# EAGLE board rauschsimulator_V4 (EAGLE 6.4)
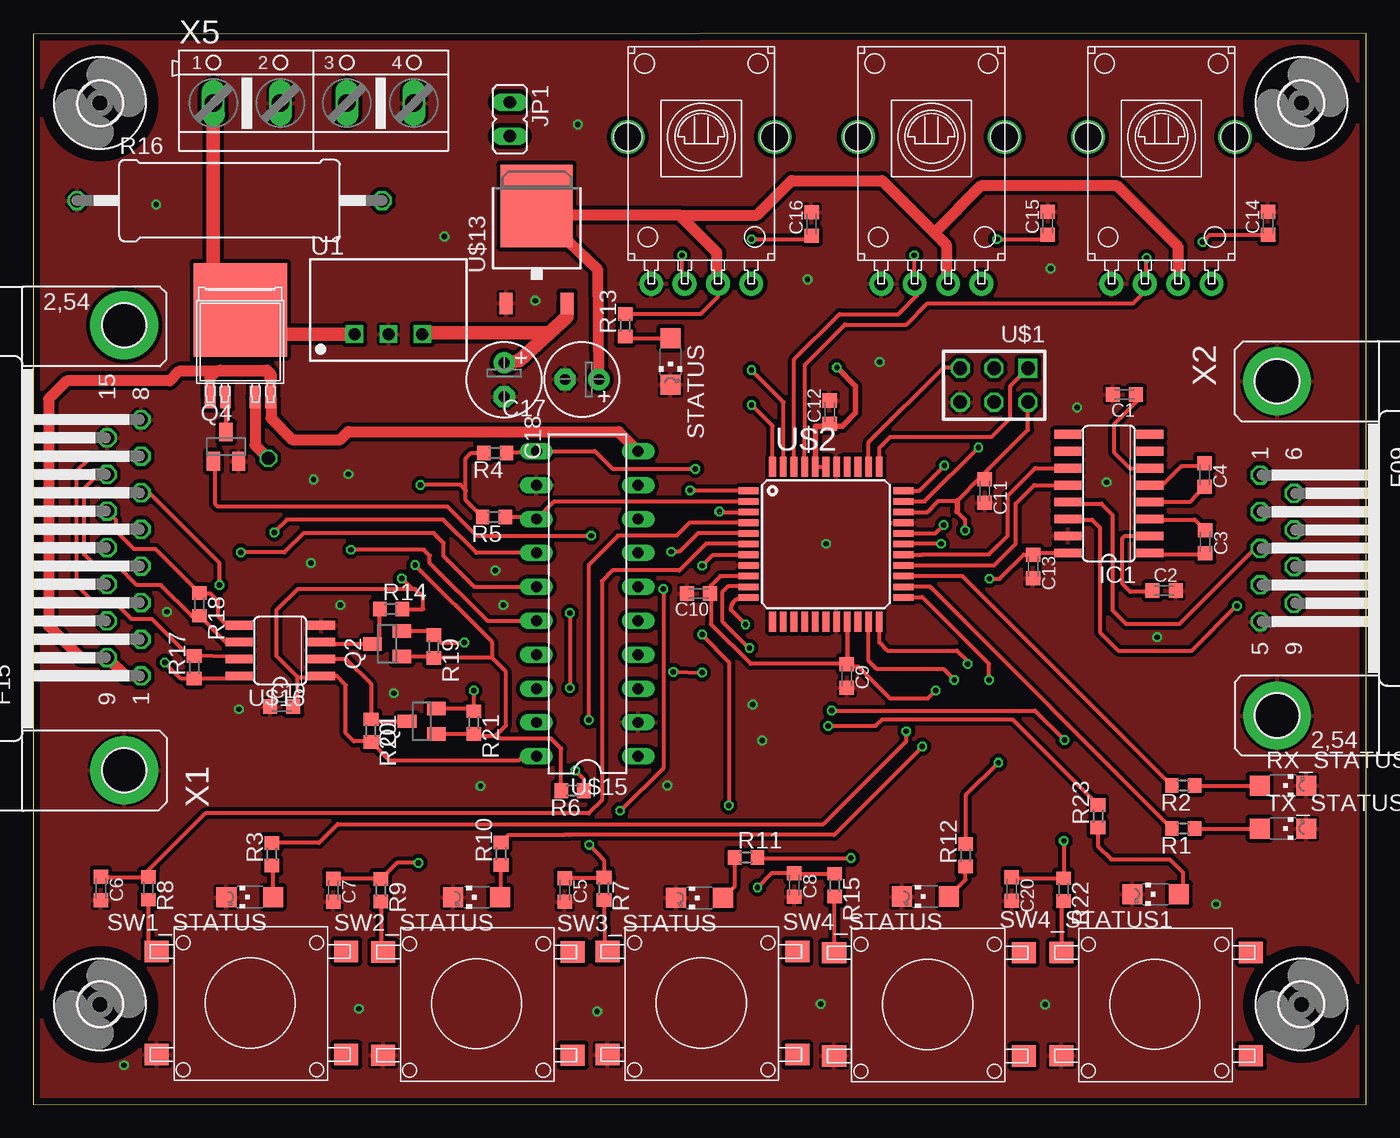
[diagram p0: board, top side]
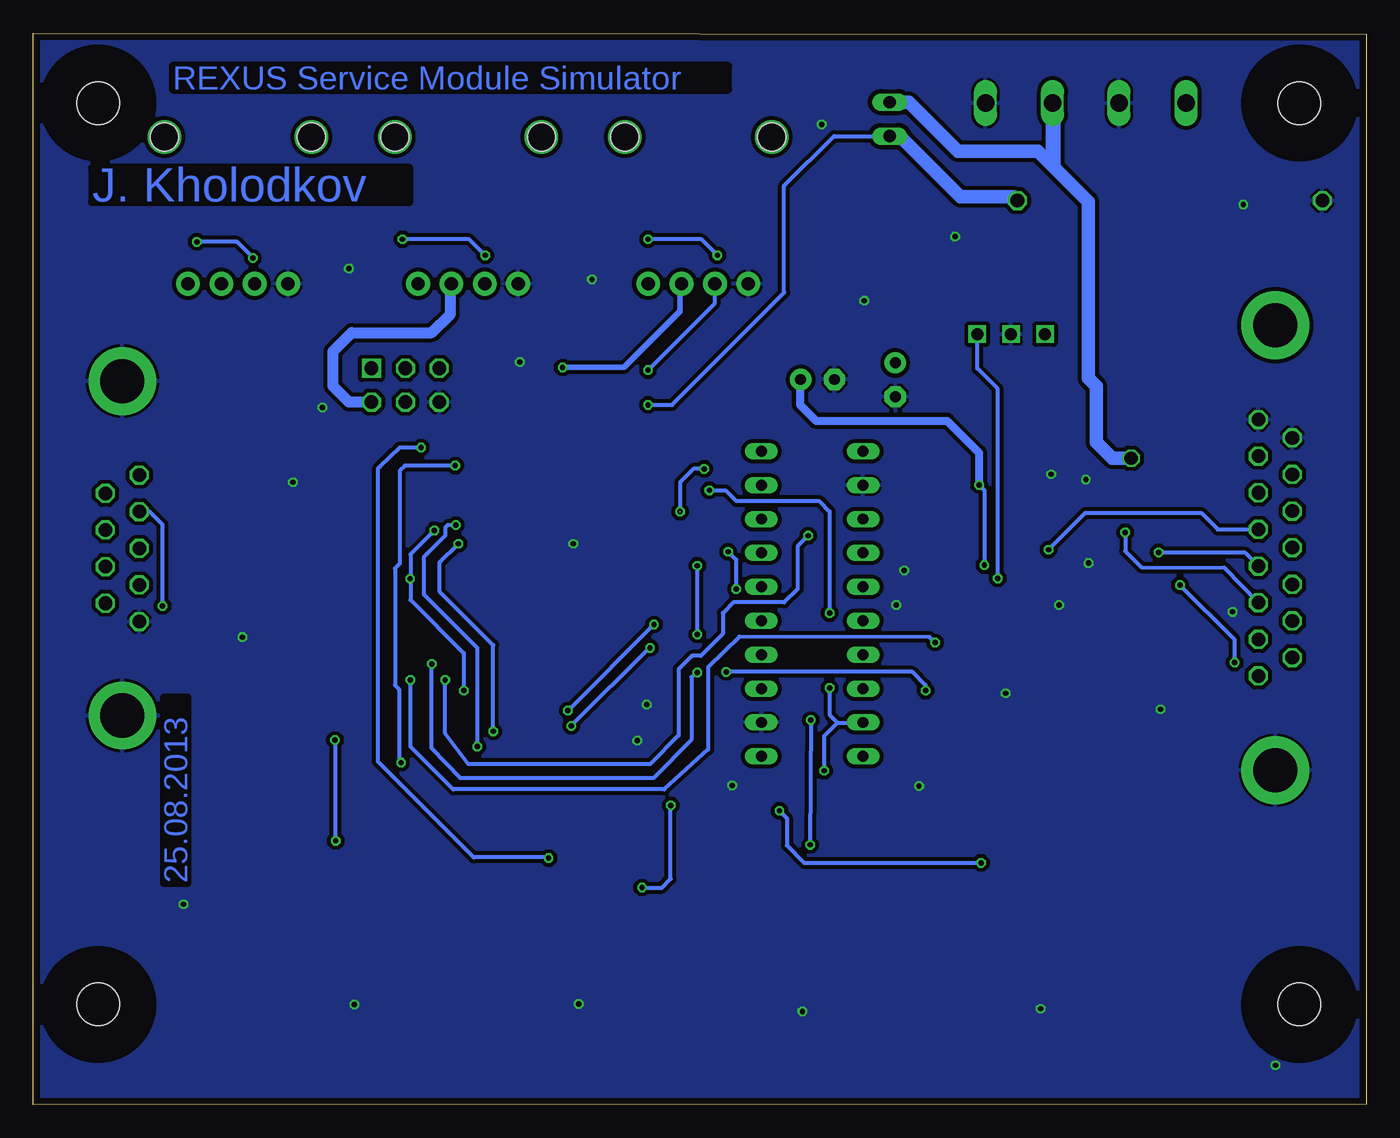
[diagram p1: board, bottom side, seen from below]

Size 99.85 x 80.22 mm. Coordinates in mm from the lower left corner, seen from the top.
Outline: 0,0 99.85,0 99.85,80.22 0,80.14 0,0
Copper layers (1*16): Top 0.035mm / dielectric 1.5mm / Bottom 0.035mm
Design rules "default": minimum track width 6mil, minimum drill 12mil, track to track 6mil, track to pad 6mil, pad to pad 6mil, via to via 6mil, smd to smd 6mil, copper to edge 20mil, drill to drill 8mil, minimum pad ring 8mil, minimum via ring 6mil, stop-mask expansion 3mil, vias tented up to drill 0mil, thermal gap 8mil

## Footprints (pad centres in the part's own frame; a part is rotated, then mirrored left to right if it is on the bottom)
C0603K = smd 1.05 x 1.08: 1 -0.875,0; 2 0.875,0
E2,5-6 = drill 0.813 pad 1.6: + -1.27,0 | drill 0.813 pad 1.6 octagon: - 1.27,0
SO16 = smd 0.66 x 2.032: 1 -4.445,-3.073; 2 -3.175,-3.073; 3 -1.905,-3.073; 4 -0.635,-3.073; 5 0.635,-3.073; 6 1.905,-3.073; 7 3.175,-3.073; 8 4.445,-3.073; 9 4.445,3.073; 10 3.175,3.073; 11 1.905,3.073; 12 0.635,3.073; 13 -0.635,3.073; 14 -1.905,3.073; 15 -3.175,3.073; 16 -4.445,3.073
JP1 = drill 0.914 long: 1 0,-1.27; 2 0,1.27
SOT23 = smd 1 x 1.4: 1 -0.95,-1.1; 2 0.95,-1.1; 3 0,1.1
R0603 = smd 1 x 1.1: 1 -0.85,0; 2 0.85,0
0617/22 = drill 1.016 octagon: 1 -11.43,0; 2 11.43,0
CHIPLED_1206 = smd 1.5 x 1.5: A 0,-1.75; C 0,1.75
IP67 = smd 1.6 x 1.8: 1 -3.865,7; 2 -3.865,-7.2; 3 3.865,7; 4 3.865,-7.2
TSR-1 = drill 0.9 square: 1 -2.54,0; 2 0,0; 3 2.54,0
AVR-ISP-6 = drill 1.016 square: 1 -2.54,-1.27 | drill 1.016 octagon: 2 -2.54,1.27; 3 0,-1.27; 4 0,1.27; 5 2.54,-1.27; 6 2.54,1.27
TQFP44 = smd 1.5 x 0.5: 1 -5.8,4; 2 -5.8,3.2; 3 -5.8,2.4; 4 -5.8,1.6; 5 -5.8,0.8; 6 -5.8,0; 7 -5.8,-0.8; 8 -5.8,-1.6; 9 -5.8,-2.4; 10 -5.8,-3.2; 11 -5.8,-4; 23 5.8,-4; 24 5.8,-3.2; 25 5.8,-2.4; 26 5.8,-1.6; 27 5.8,-0.8; 28 5.8,0; 29 5.8,0.8; 30 5.8,1.6; 31 5.8,2.4; 32 5.8,3.2; 33 5.8,4 | smd 0.5 x 1.5: 12 -4,-5.8; 13 -3.2,-5.8; 14 -2.4,-5.8; 15 -1.6,-5.8; 16 -0.8,-5.8; 17 0,-5.8; 18 0.8,-5.8; 19 1.6,-5.8; 20 2.4,-5.8; 21 3.2,-5.8; 22 4,-5.8; 34 4,5.8; 35 3.2,5.8; 36 2.4,5.8; 37 1.6,5.8; 38 0.8,5.8; 39 0,5.8; 40 -0.8,5.8; 41 -1.6,5.8; 42 -2.4,5.8; 43 -3.2,5.8; 44 -4,5.8
VERT_POTI = drill 1 pad 1.778: P1 -3.75,-11; P2 -1.25,-11; P3 1.25,-11; P4 3.75,-11 | drill 2.1: P$5 5.5,0; P$6 -5.5,0 | hole 2.1: 5.5,0; -5.5,0
3,2 = hole 3.2: 0,0
TO252 = smd 1 x 1.6: 1 -2.28,-4.8; 2 2.28,-4.8 | smd 5.4 x 6.2: 3 0,2.5
TO-252-5-1 = smd 0.813 x 1.676: PIN1 -2.255,-3; PIN2 -1.115,-3; PIN4 1.115,-3; PIN5 2.255,-3 | smd 7 x 7: TAB 0,3.51
DIL20 = drill 0.813 long: 1 -3.81,11.43; 2 -3.81,8.89; 3 -3.81,6.35; 4 -3.81,3.81; 5 -3.81,1.27; 6 -3.81,-1.27; 7 -3.81,-3.81; 8 -3.81,-6.35; 9 -3.81,-8.89; 10 -3.81,-11.43; 11 3.81,-11.43; 12 3.81,-8.89; 13 3.81,-6.35; 14 3.81,-3.81; 15 3.81,-1.27; 16 3.81,1.27; 17 3.81,3.81; 18 3.81,6.35; 19 3.81,8.89; 20 3.81,11.43
SO08 = smd 0.66 x 2.032: 1 -1.905,-3.073; 2 -0.635,-3.073; 3 0.635,-3.073; 4 1.905,-3.073; 5 1.905,3.073; 6 0.635,3.073; 7 -0.635,3.073; 8 -1.905,3.073
F15HP = drill 1.016 octagon: 1 -9.601,-1.27; 2 -6.858,-1.27; 3 -4.115,-1.27; 4 -1.372,-1.27; 5 1.372,-1.27; 6 4.115,-1.27; 7 6.858,-1.27; 8 9.601,-1.27; 9 -8.23,1.27; 10 -5.486,1.27; 11 -2.743,1.27; 12 0,1.27; 13 2.743,1.27; 14 5.486,1.27; 15 8.23,1.27 | drill 3.302 pad 5.08: G1 -16.662,0; G2 16.662,0
F09HP = drill 1.016 octagon: 1 -5.486,-1.27; 2 -2.743,-1.27; 3 0,-1.27; 4 2.743,-1.27; 5 5.486,-1.27; 6 -4.115,1.27; 7 -1.372,1.27; 8 1.372,1.27; 9 4.115,1.27 | drill 3.302 pad 5.08: G1 -12.522,0; G2 12.522,0
AK500/4 = drill 1.321 long: 1 -7.518,0; 2 -2.489,0; 3 2.489,0; 4 7.518,0

## Placement (x,y rotation side)
C1  200n  [C0603K]  81.73,53.17 180 top
C2  200n  [C0603K]  84.72,38.49 0 top
C3  200n  [C0603K]  87.8,42.15 270 top
C4  200n  [C0603K]  87.74,47.16 270 top
C5  100n  [C0603K]  39.8,16.06 270 top
C6  100n  [C0603K]  5.06,16.18 270 top
C7  100n  [C0603K]  22.47,16.05 270 top
C8  100n  [C0603K]  57.01,16.43 270 top
C9  100n  [C0603K]  60.94,32.1 270 top
C10  100n  [C0603K]  49.83,38.27 180 top
C11  100n  [C0603K]  71.27,45.94 270 top
C12  100n  [C0603K]  59.65,51.85 90 top
C13  200n  [C0603K]  74.9,40.3 270 top
C14  100n  [C0603K]  92.5,66 90 top
C15  100n  [C0603K]  76,66 90 top
C16  100n  [C0603K]  58.3,65.95 90 top
C17  [E2,5-6]  41.1,54.3 180 top
C18  [E2,5-6]  35.27,54.28 270 top
C19  100n  [C0603K]  18.6,29.8 0 top
C20  100n  [C0603K]  73.29,16.15 270 top
IC1  MAX3232ESE  [SO16]  80.58,45.76 90 top
JP1  [JP1]  35.7,73.8 180 top
Q1  BSS123  [SOT23]  29.1,28.7 90 top
Q2  BSS123  [SOT23]  26.5,34.5 90 top
Q4  BSS123  [SOT23]  14.44,49.27 0 top
R1  220  [R0603]  86.14,20.67 180 top
R2  220  [R0603]  86.14,23.89 180 top
R3  220  [R0603]  17.88,18.75 90 top
R4  10k  [R0603]  34.6,48.8 180 top
R5  10k  [R0603]  34.5,44 180 top
R6  10k  [R0603]  40.4,23.5 180 top
R7  1k  [R0603]  42.75,16.16 270 top
R8  1k  [R0603]  8.62,16.18 270 top
R9  1k  [R0603]  26.04,16.05 270 top
R10  220  [R0603]  35.04,18.77 90 top
R11  220  [R0603]  53.4,18.51 0 top
R12  220  [R0603]  69.85,18.67 90 top
R13  220  [R0603]  44.34,58.36 90 top
R14  10k  [R0603]  26.8,37.1 0 top
R15  1k  [R0603]  60.03,16.43 270 top
R16  [0617/22]  14.7,67.7 0 top
R17  10k  [R0603]  12.05,32.75 90 top
R18  100k  [R0603]  12.45,37.45 270 top
R19  10k  [R0603]  30,34.3 270 top
R20  10k  [R0603]  25.3,28 270 top
R21  10k  [R0603]  33,28.6 270 top
R22  1k  [R0603]  77.18,16.1 270 top
R23  220  [R0603]  79.76,21.59 90 top
RX_STATUS  [CHIPLED_1206]  93.62,23.89 270 top
STATUS  [CHIPLED_1206]  47.73,55.65 180 top
SW1  SMS_IP67  [IP67]  16.23,7.6 90 top
SW1_STATUS  [CHIPLED_1206]  16.21,15.54 90 top
SW2  SMS_IP67  [IP67]  33.2,7.55 90 top
SW2_STATUS  [CHIPLED_1206]  33.21,15.52 90 top
SW3  SMS_IP67  [IP67]  50.03,7.6 90 top
SW3_STATUS  [CHIPLED_1206]  49.91,15.47 90 top
SW4  SMS_IP67  [IP67]  67,7.5 90 top
SW4_STATUS  [CHIPLED_1206]  66.83,15.58 90 top
SW4_STATUS1  [CHIPLED_1206]  84.07,15.75 90 top
SW5  SMS_IP67  [IP67]  84.02,7.52 90 top
TX_STATUS  [CHIPLED_1206]  93.62,20.67 270 top
U1  TSR_1-2450  [TSR-1]  26.6,57.7 0 top
U$1  AVR-PDIVERT  [AVR-ISP-6]  71.98,53.87 180 top
U$2  XMEGA-A4TQFP  [TQFP44]  59.38,41.97 0 top
U$3  [VERT_POTI]  50.04,72.47 0 top
U$4  [VERT_POTI]  67.28,72.47 0 top
U$5  [VERT_POTI]  84.52,72.47 0 top
U$6  [3,2]  5,75 0 top
U$7  [3,2]  95,75 0 top
U$8  [3,2]  95,7.5 0 top
U$10  [3,2]  5,7.5 0 top
U$13  LM1117  [TO252]  37.7,64.8 0 top
U$14  BTS6143  [TO-252-5-1]  15.5,56 0 top
U$15  UDN2596  [DIL20]  41.5,37.5 180 top
U$16  SP490  [SO08]  18.5,34 90 top
X1  [F15HP]  6.8,41.7 90 top
X2  [F09HP]  93.18,41.66 270 top
X5  [AK500/4]  21,75 0 top

## Library data of the parts
C1-C16 C19 C20 R1-R23 = rcl
C17 C18 = resistor
IC1 = maxim; MF: MAXIM; MPN: MAX3232ESE; OC_FARNELL: 9725539; OC_NEWARK: 79C3880
JP1 = jumper
Q1 Q2 Q4 = transistor-small-signal
RX_STATUS STATUS SW1_STATUS SW2_STATUS SW3_STATUS SW4_STATUS SW4_STATUS1 TX_STATUS = led
SW1-SW5 = SMSIp67
U1 = _traco_tsr-1
U$1 U$2 = avr-7
U$3-U$5 = poti
U$6-U$8 U$10 = holes
U$13 = LM1117
U$14 = BTS6134
U$15 = UDN2596
U$16 = SP491
X1 X2 = con-subd; OC_FARNELL: unknown; OC_NEWARK: unknown
X5 = con-ptr500; OC_FARNELL: unknown; OC_NEWARK: unknown

## Nets
28V_IN: U1.1 U$14.TAB X5.1
28V_OUT: U$14.PIN1 U$14.PIN5 U$15.10 X1.1 X1.9
COMMANDS_TO_EXP+: R18.1 U$16.5 X1.13
COMMANDS_TO_EXP-: R18.2 U$16.6 X1.14
DATA_FROM_EXP+: R17.1 U$16.8 X1.6
DATA_FROM_EXP-: R17.2 U$16.7 X1.7
GND: C1.2 C2.2 C5.2 C6.2 C7.2 C8.2 C9.2 C10.2 C11.2 C12.2 C13.2 C14.2 C15.2 C16.2 C17.- C18.- C19.1 C20.2 IC1.15 Q4.2 R16.1 RX_STATUS.C STATUS.C SW1.1 SW1_STATUS.C SW2.1 SW2_STATUS.C SW3.1 SW3_STATUS.C SW4.1 SW4_STATUS1.C SW4_STATUS.C SW5.1 TX_STATUS.C U1.2 U$1.6 U$2.8 U$2.18 U$2.30 U$2.38 U$3.P1 U$4.P1 U$5.P1 U$13.1 U$15.2 U$15.12 U$16.4 X1.8 X1.15 X1.G1 X2.5 X2.G1 X2.G2 X5.2 X5.4
ISENSE: JP1.2 R16.2 U$2.44
LO: U$15.16 X1.5
LO_: R6.1 U$2.1 U$15.19
N$1: C1.1 IC1.6
N$2: C2.1 IC1.2
N$3: C4.2 IC1.4
N$4: C4.1 IC1.5
N$5: C3.1 IC1.3
N$6: C3.2 IC1.1
N$7: U$1.1 U$2.34
N$8: Q1.2 R21.1 U$2.22
N$9: Q2.2 R19.1 U$2.23
N$10: IC1.13 X2.3
N$13: R8.2 SW1.3
N$14: IC1.14 X2.2
N$15: R9.2 SW2.3
N$16: R7.2 SW3.3
N$17: U$1.5 U$2.35
N$18: Q4.3 U$14.PIN2
N$19: U$2.12
N$20: R10.1 SW2_STATUS.A
N$21: R1.1 TX_STATUS.A
N$22: R2.1 RX_STATUS.A
N$23: R3.1 SW1_STATUS.A
N$24: R11.1 SW3_STATUS.A
N$25: R12.1 SW4_STATUS.A
N$26: R13.1 STATUS.A
N$27: R15.2 SW4.3
N$29: U$2.13
N$30: U$2.14
N$31: U$2.15
N$32: U$2.16
N$33: U$2.17
N$34: U$2.20
N$35: R23.1 SW4_STATUS1.A
N$36: JP1.1 U$14.PIN4 X5.3
N$38: R22.2 SW5.3
POTI1: C14.1 U$2.41 U$5.P2
POTI2: C15.1 U$2.42 U$4.P2
POTI3: C16.1 U$2.43 U$3.P2
RXD_EX: Q1.3 R20.1 U$16.2
RXD_GRND: IC1.12 U$2.26
RXD_STATUS: R2.2 U$2.25
SODS: U$15.14 X1.3
SODS_: R4.1 U$2.3 U$15.11
SOE: U$15.15 X1.4
SOE_: R5.1 U$2.2 U$15.13
SUPPLY_CTRL: Q4.1 U$2.21
SW1: C5.1 R7.1 U$2.4
SW1_STATUS: R3.2 U$2.28
SW2: C7.1 R9.1 U$2.5
SW2_STATUS: R10.2 U$2.29
SW3: C6.1 R8.1 U$2.6
SW3_STATUS: R11.2 U$2.32
SW4: C8.1 R15.1 U$2.7
SW4_STATUS: R12.2 U$2.33
SW5: C20.1 R22.1 U$2.11
SW5_STATUS: R23.2 U$2.10
TXD_EX: Q2.3 R14.1 U$16.3
TXD_GRND: IC1.11 U$2.27
TXD_STATUS: R1.2 U$2.24
VCC_3V: C9.1 C10.1 C11.1 C12.1 C13.1 C17.+ IC1.16 Q1.1 Q2.1 R4.2 R5.2 R6.2 R13.2 R19.2 R21.2 U$1.2 U$2.9 U$2.19 U$2.31 U$2.39 U$2.40 U$3.P3 U$4.P3 U$5.P3 U$13.3
VCC_5V: C18.+ C19.2 R14.2 R20.2 U1.3 U$13.2 U$15.20 U$16.1

## Tracks (layer width: path | path; a pad name or v marks a point on that pad's centre or on a via)
28V_IN
  Top 0.305: U$14.TAB 17.31,57.7
  Top 1.016: U$14.TAB 13.48,61.53 X5.1 | 17.31,57.7 U1.1
28V_OUT
  Top 0.406: U$14.PIN5 17.75,54.6 17.75,54.8 17.45,55.1 14.15,55.1 13.24,54.2 U$14.PIN1
  Top 0.813: U$14.PIN5 17.8,52.95 | 17.8,52.95 17.8,51.4 19.4,49.8 23,49.8 23.6,50.4 43.84,50.4 U$15.10 | U$14.PIN1 13.25,54.55 13.65,54.95 13.95,54.95 14,55 17.5,55 17.8,54.7 17.8,54.2 | 17.8,52.95 17.8,54.2 | 17.8,54.2 17.75,54.25 17.75,54.6 17.45,54.9 10.9,54.9 10.2,54.2 2.5,54.2 1.15,52.85 1.15,35.85 3.53,33.47 X1.9 6.9,32.1 X1.1
COMMANDS_TO_EXP+
  Top 0.305: U$16.5 14.49,35.91 13.85,36.55 13.85,37.7 13.3,38.25 12.5,38.25 R18.1 9.15,41.6 7.55,41.6 6.2,42.95 6.2,43.77 X1.13
COMMANDS_TO_EXP-
  Top 0.305: U$16.6 14.41,34.63 R18.2 11.85,36.6 9.55,38.9 7.75,38.9 6.35,40.3 4.7,40.3 3.8,41.2 3.8,46.15 4.55,46.9 5.24,46.9 X1.14
DATA_FROM_EXP+  (via drill 0.4)
  Top 0.305: U$16.8 15.23,31.9 R17.1 11.05,31.9 v9.85,33.1 | v13.95,38.9 13.95,40.55 8.69,45.81 X1.6
  Bottom 0.305: v9.85,33.1 9.85,34.8 v13.95,38.9
DATA_FROM_EXP-
  Top 0.305: U$16.7 14.84,33.55 R17.2 11.65,33.6 8.9,36.35 7.35,36.35 6.05,37.65 4.5,37.65 3.25,38.9 3.25,47.45 4.1,48.3 4.1,48.35 4.35,48.6 8.03,48.6 X1.7
GND  (via drill 0.4)
  other vias: 23,37.4 15.4,29.6 6.8,2.94 24.39,7.17 42.23,6.97 58.99,7.53 37.6,60.2 30.8,65 40.8,73.4 78.2,52.2 59.4,42 23.6,47.2 20.8,40.55 76.2,62.6 58,61.8 9.2,67.4 88.6,15 80.4,46.6 21,46.8 63.4,55.6 53.9,29.95 54.6,27.25 27,30.8 35.2,37.4 34.6,40 84.2,35 47.5,23.9 33.5,23.85 75.79,7.48 10,36.9
  pour Bottom (isolate 0.305): 0,80 0,0 100,0 100,80
  pour Top (isolate 0.305): 0,80 0,0.05 100,0 100,80
ISENSE  (via drill 0.4)
  Top 0.305: U$2.44 55.38,50.82 v53.8,52.4
  Bottom 0.305: v53.8,52.4 52,52.4 43.6,60.8 43.6,68.8 39.87,72.53 JP1.2
  Bottom 1.016: R16.2 26.43,68 30.4,68 34.93,72.53 JP1.2
LO  (via drill 0.4)
  Top 0.305: U$15.16 37.66,36.2 34.05,36.2 29.7,40.55 29.7,41.1 29.25,41.55 v23.8,41.55
  Bottom 0.305: v23.8,41.55 21.05,44.3 12.35,44.3 11.12,43.07 X1.5
LO_  (via drill 0.4)
  Top 0.305: U$2.1 49.23,45.97 v49.2,46 | v40.2,36.8 v40.2,31.2 | R6.1 41.25,24.35 v40.6,25
  Bottom 0.305: v49.2,46 48,46 47.2,45.2 41,45.2 40.2,44.4 v40.2,36.8 | v40.2,31.2 40.2,29.2 39.6,28.6 | 39.6,28.6 U$15.19 | v40.6,25 40.6,27.6 39.6,28.6
N$1
  Top 0.305: IC1.6 83.59,47.6 82.2,47.6 81,48.8 81,51 82.69,52.69 C1.1
N$2
  Top 0.305: C2.1 83.68,38.4 82.2,38.4 81.6,39 81.6,42.4 81.78,42.58 IC1.2
N$3
  Top 0.305: C4.2 86.66,45.12 IC1.4
N$4
  Top 0.305: C4.1 87.44,47.8 86,47.8 84.59,46.39 IC1.5
N$5
  Top 0.305: IC1.3 83.7,43.8 87,43.8 87.7,43.1 C3.1
N$6
  Top 0.305: IC1.1 84.36,41.2 87.72,41.2 C3.2
N$7
  Top 0.305: U$2.34 63.4,47.79 63.4,49.2 64.2,50 71.8,50 73.2,51.4 73.2,53.82 U$1.1
N$8  (via drill 0.4)
  Top 0.305: Q1.2 32.8,29.65 R21.1 v33,31 | v47.95,32.4 v50.1,32.35 | U$2.22 63.38,34.62 64,34 69.2,34 70,33.2 v70,33
  Bottom 0.305: v33,31 33,31.4 34,32.4 v47.95,32.4 | v50.1,32.35 50.55,32 50.55,27.3 53.4,24.45 67.85,24.45 70,26.7 v70,33
N$9  (via drill 0.4)
  Top 0.305: Q2.2 29.9,35.45 30,35.35 R19.1 30.55,34.6 v32.3,34.6 | U$2.23 65.21,38 66.6,38 71.6,33 v71.6,31.8
  Bottom 0.305: v32.3,34.6 32.7,35 46.95,35.05 49.3,32.75 49.3,26.6 52.6,23.6 68.4,23.6 71.6,26.8 v71.6,31.8
N$10
  Top 0.305: IC1.13 77.63,45 80.02,45 80.85,44.16 80.85,37 81.85,36 85.89,36 91.55,41.66 X2.3
N$13
  Top 0.305: R8.2 8.62,11.5 SW1.3
N$14  (via drill 0.4)
  Top 0.305: IC1.14 77.56,43.8 79.31,43.8 79.91,43.2 79.91,35.38 81.29,34 86.8,34 90.14,37.34 v90.17,37.34
  Bottom 0.305: v90.17,37.34 90.17,43.43 91.14,44.4 X2.2
N$15
  Top 0.305: R9.2 26.04,12 SW2.3
N$16
  Top 0.305: R7.2 42.78,11.48 SW3.3
N$17
  Top 0.305: U$2.35 62.58,49.58 68.2,55.2 69.38,55.2 U$1.5
N$18
  Top 0.305: Q4.3 14.44,52.95 U$14.PIN2
N$20
  Top 0.305: SW2_STATUS.A 35.04,16.35 R10.1
N$21
  Top 0.305: R1.1 TX_STATUS.A
N$22
  Top 0.305: R2.1 RX_STATUS.A
N$23
  Top 0.305: SW1_STATUS.A 17.96,17.73 R3.1
N$24
  Top 0.305: SW3_STATUS.A 52.55,16.36 R11.1
N$25
  Top 0.305: SW4_STATUS.A 69.85,16.84 R12.1
N$26
  Top 0.305: R13.1 44.45,57.4 STATUS.A
N$27
  Top 0.305: R15.2 60,15.55 SW4.3
N$35
  Top 0.305: R23.1 79.76,19.34 80.75,18.35 85.15,18.35 86.1,17.4 86.1,16.02 SW4_STATUS1.A
N$36  (via drill 1)
  Top 0.813: U$14.PIN4 16.61,49.38 v17.6,48.4
  Bottom 1.016: 23.4,70.2 20.8,67.6 20.8,54.4 20.2,53.8 20.2,49.6 19,48.4 v17.6,48.4 | 23.4,70.2 23.49,70.29 | 23.49,70.29 X5.3 23.4,74.91 23.4,70.2 | 23.49,70.29 24.6,71.4 30.6,71.4 34.27,75.07 JP1.1
N$38
  Top 0.305: R22.2 77,15.07 77,10.7 77.07,10.77 SW5.3
POTI1  (via drill 0.4)
  Top 0.305: v83.4,63.4 83.4,61.47 U$5.P2 83.27,60.87 82.4,60 67,60 65.4,58.4 60.8,58.4 57.8,55.4 57.8,50.4 57.78,49.42 U$2.41 | v87.6,64.6 88.12,65.12 C14.1
  Bottom 0.305: v83.4,63.4 84.6,64.6 v87.6,64.6
POTI2  (via drill 0.4)
  Top 0.305: v66,63.6 66,61.5 U$4.P2 66.2,61.3 66.2,60.6 64.8,59.2 60.4,59.2 57,55.8 57,49.6 56.98,49.02 U$2.42 | v72.2,64.8 76,64.8 C15.1
  Bottom 0.305: v66,63.6 67.2,64.8 v72.2,64.8
POTI3  (via drill 0.4)
  Top 0.305: U$3.P2 48.6,61.66 v48.6,63.6 | v53.8,64.8 58.02,64.8 C16.1 | U$2.43 56.2,47.79 56.2,52.6 v53.8,55
  Bottom 0.305: v48.6,63.6 49.8,64.8 v53.8,64.8 | v53.8,55 48.79,60.01 U$3.P2
RXD_EX
  Top 0.305: U$16.2 21.61,33.4 23.4,33.4 25.3,31.5 R20.1 25.45,28.7 Q1.3
RXD_GRND
  Top 0.305: U$2.26 65.21,40.4 72,40.4 73.6,42 73.6,45 74.99,46.39 IC1.12
RXD_STATUS
  Top 0.305: R2.2 69.61,39.57 U$2.25
SODS  (via drill 0.4)
  Top 0.305: U$15.14 33.19,41.31 30.7,43.8 19,43.8 v18.05,42.85
  Bottom 0.305: v18.05,42.85 18.05,41.45 16.85,40.25 10.63,40.2 X1.3
SODS_  (via drill 0.4)  (1 unrouted)
  Top 0.305: R4.1 37.56,48.8 U$15.11 42.07,48.93 43.4,47.6 v49.6,47.6 | 51.43,44.37 U$2.3
  Bottom 0.305: v49.6,47.6 50.4,47.6 51.4,46.6 v51.4,44.4
SOE  (via drill 0.4)
  Top 0.305: U$15.15 37.67,38.75 33.05,38.75 30.75,41.05 30.75,42.05 30,42.8 20.25,42.8 18.8,41.35 v15.55,41.35
  Bottom 0.305: v15.55,41.35 9.09,41.35 X1.4
SOE_
  Top 0.305: R5.1 37.54,44 U$15.13 39.01,45.17 U$2.2
SUPPLY_CTRL  (via drill 0.4)
  Top 0.305: Q4.1 13.6,48.05 13.6,45 13.8,44.8 31,44.8 33.2,42.6 v41.8,42.6 | v69,31.8 68.2,32.6 63.2,32.6 62.58,33.22 U$2.21
  Bottom 0.305: v41.8,42.6 42.6,41.8 42.6,38.6 43.6,37.6 47.4,37.6 48.2,36.8 48.2,35.25 49.85,33.6 50.5,33.6 51.5,32.6 51.5,27.65 53.65,25.5 67.25,25.5 69,27.8 v69,31.8
SW1  (via drill 0.4)
  Top 0.305: U$2.4 49.17,43.57 48.2,42.6 43.8,42.6 41.6,40.4 v41.6,28.8 | 43.21,17.01 R7.1 | R7.1 42.68,16.94 C5.1 | v41.65,19.45 42.75,18.3 R7.1
  Bottom 0.305: v41.6,28.8 v41.65,19.45
SW1_STATUS  (via drill 0.4)
  Top 0.305: v68,42 65.21,42 U$2.28 | v65.4,27.95 65.4,27.2 59.2,21 22.8,21 21.39,19.59 R3.2
  Bottom 0.305: v68,42 69.4,40.6 69.4,38.4 65.4,34.4 v65.4,27.95
SW2  (via drill 0.4)
  Top 0.305: U$2.5 53.55,42.8 49.8,42.8 48.4,41.4 v47.8,41.4 | v47.2,38.6 47.2,25.2 44,22 v43.95,22 | C7.1 22.5,16.9 R9.1 27.24,18.1 v28.85,18.1
  Bottom 0.305: v47.8,41.4 47.2,40.8 v47.2,38.6 | v43.95,22 43.4,21.45 43.4,19.4 42.1,18.1 v28.85,18.1
SW2_STATUS  (via drill 0.4)
  Top 0.305: U$2.29 67.57,42.77 v68.2,43.4 | v66.6,26.8 60,20.2 40.2,20.2 39.8,20.2 35.62,20.2 R10.2
  Bottom 0.305: v68.2,43.4 68.8,43.4 69,43.2 69,42.6 70.6,41 70.6,38.2 66.6,34.2 v66.6,26.8
SW3
  Top 0.305: U$2.6 53.55,42 50.4,42 48.4,40 43.4,40 42.6,39.2 42.6,22.8 41.6,21.8 12.88,21.8 8.62,17.54 R8.1 5.06,17.04 C6.1
SW3_STATUS  (via drill 0.4)
  Top 0.305: U$2.32 66.77,45.17 v70.8,49.2 | R11.2 54.31,18.45 v61.25,18.45
  Bottom 0.305: v70.8,49.2 72.4,49.2 73.9,47.75 74.05,47.6 74.05,25.7 66.86,18.51 61.31,18.51 v61.25,18.45
SW4  (via drill 0.4)
  Top 0.305: R15.1 57.03,17.28 C8.1 55.31,17.31 v54.25,16.25 | v50.1,35.2 52.15,33.1 52.15,22.45 arc-90 v52.1,22.4 | v50.1,40.35 50.92,41.17 U$2.7
  Bottom 0.305: v54.25,16.25 52.75,16.25 52.1,16.9 v52.1,22.4 | v50.1,35.2 v50.1,40.35
SW4_STATUS  (via drill 0.4)
  Top 0.305: U$2.33 66.37,45.97 v68.25,47.85 | v72.3,25.6 69.85,23.15 R12.2
  Bottom 0.305: v68.25,47.85 72,47.85 72.4,47.45 72.4,40.5 72.75,40.15 72.75,31.4 72.45,31.1 72.45,25.75 v72.3,25.6
SW5  (via drill 0.4)
  Top 0.305: C20.1 73.37,16.95 R22.1 77.2,16.97 v77.2,19.75 | U$2.11 arc-90 53.56,37.95 53.3,37.95 arc90 52.25,37.2 52.25,37.05 v53.35,35.95 | v59.8,29.5 75.05,29.5 v77.25,27.3
  Bottom 0.305: v53.35,35.95 v59.8,29.5 | v77.25,27.3 77.25,19.8 v77.2,19.75
SW5_STATUS  (via drill 0.4)
  Top 0.305: U$2.10 53.55,38.8 52.05,38.8 51.6,38.35 51.6,36.2 53.5,34.3 v53.65,34.2 | v59.55,28.35 63.1,28.35 63.6,28.85 73.35,28.85 75.25,26.95 R23.2
  Bottom 0.305: v53.65,34.2 53.7,34.2 v59.55,28.35
TXD_EX
  Top 0.305: U$16.3 21.71,34.5 Q2.3 25.95,34.65 R14.1
TXD_GRND
  Top 0.305: U$2.27 66.57,41.17 66.6,41.2 71.6,41.2 73,42.6 73,45.6 75.06,47.66 IC1.11 77.45,47.6
TXD_STATUS
  Top 0.305: R1.2 67.19,38.77 U$2.24
VCC_3V  (via drill 0.38, 0.4)
  Top 0.305: Q1.1 R21.2 33.15,27.6 34.6,27.6 34.7,27.7 | Q2.1 30.1,33.55 R19.2 34.35,33.45 | 34.7,27.7 35.4,28.4 35.4,32.4 34.35,33.45 | R13.2 50.01,59.21 51.29,60.49 U$3.P3 | U$4.P3 68.6,61.54 | C12.1 58.58,50.84 U$2.40 58.63,47.77 U$2.39 | 71,47 69.22,45.22 68.87,45.22 68.86,45.2 67.8,45.2 66.97,44.37 U$2.31 65.21,44.4 | 71,47 74.52,50.52 U$1.2 | 60.94,33.13 C9.1 61.11,32.8 61.8,32.8 64.2,30.4 67,30.4 v67.6,31 | U$2.9 51.47,39.57 50.77,38.87 50.77,38.71 | R6.2 39.55,26.65 38.8,27.4 35,27.4 34.7,27.7 | 32.4,46 32.4,48.4 32.8,48.8 R4.2 | R5.2 32.4,45.25 32.4,46 | 32.4,46 32,46.4 v29,46.4 | v28.6,40.4 34.35,34.65 34.35,33.45 | 61,32.8 61,36.15 U$2.19 60.94,36.12 60.94,33.13 | C11.1 71.08,47 71,47 | 69.2,44.4 69.8,43.8 v69.8,43 | 60.94,33.13 60.8,33 53.75,33 50.77,35.98 50.77,38.71 | v71.63,39.37 72.39,39.37 74.19,41.17 C13.1 75.03,41.31 IC1.16 | 50.77,38.71 50.71,38.61 C10.1
  Top 0.406: 58.63,47.77 58.6,47.8 58.6,50.8 60.6,50.8 61.6,51.8 61.6,53.8 v60.2,55.2 | 69.2,44.4 69.22,44.4 69.22,45.22
  Top 0.813: 38,66.6 42.3,62.5 C17.+ | 38,66.6 37.7,66.9 U$13.3 | U$3.P3 51.2,61.56 51.2,63.8 48.4,66.6 | 48.4,66.6 38,66.6 | 48.4,66.6 54.2,66.6 56.8,69.2 63.6,69.2 67.5,65.3 | 67.5,65.3 68.4,64.4 68.4,61.6 U$4.P3 | U$5.P3 85.77,64.23 81.2,68.8 71,68.8 67.5,65.3
  Bottom 0.305: v29,46.4 28.6,46 v28.6,40.4 | v69.8,43 71.6,41.2 71.6,39.4 | 71.6,39.4 71.6,37.8 67.6,33.8 v67.6,31 | 71.6,39.4 v71.63,39.37
  Bottom 0.406: v60.2,55.2 55.6,55.2 51.4,59.4 51.4,61.36 U$3.P3
  Bottom 0.61: C17.+ 42.4,54.27 42.4,52.4 41.2,51.2 31.4,51.2 29,48.8 v29,46.4
  Bottom 0.813: U$1.2 76.2,52.6 77.4,53.8 77.4,56.4 76,57.8 70,57.8 68.6,59.2 68.6,61.4 U$4.P3
VCC_5V  (via drill 0.4)
  Top 0.305: U$15.20 36.67,26.07 36.4,25.8 26.65,25.8 R20.2 25.25,27.2 24,27.2 23.4,27.8 23.4,31.4 22.7,32.09 U$16.1 21.48,32 19.8,32 | R14.2 29.2,37.1 29.2,38 28.6,38.6 28.4,38.6 | 28.4,38.6 19.8,38.6 18.2,37 18.2,33.6 19.8,32 | C19.2 19.8,30.12 19.8,32 | 28.4,38.6 v27.6,39.4
  Top 1.016: U1.3 29.24,57.8 38.7,57.8 39.98,58.98 | 39.98,58.98 U$13.2 | C18.+ 36.38,55.71 39.98,58.98
  Bottom 0.305: v27.6,39.4 27.6,53.6 29.14,55.14 U1.3

## Text on the board
Bottom: REXUS Service Module Simulator | J. Kholodkov | 25.08.2013